# Altium PCB EBC2.PcbDoc (part 1 of 2)
Units mil, origin at the board's own origin, x right, y up, seen from the top; angles counter-clockwise.
Board outline 4019.72 x 2051.49 mil, 2 copper layers (Top Layer, Bottom Layer), stack 12.8 mil thick; 138 components, 112 nets, 469 pads, 88 vias.
Unrouted connection lines stored in the file: 2.
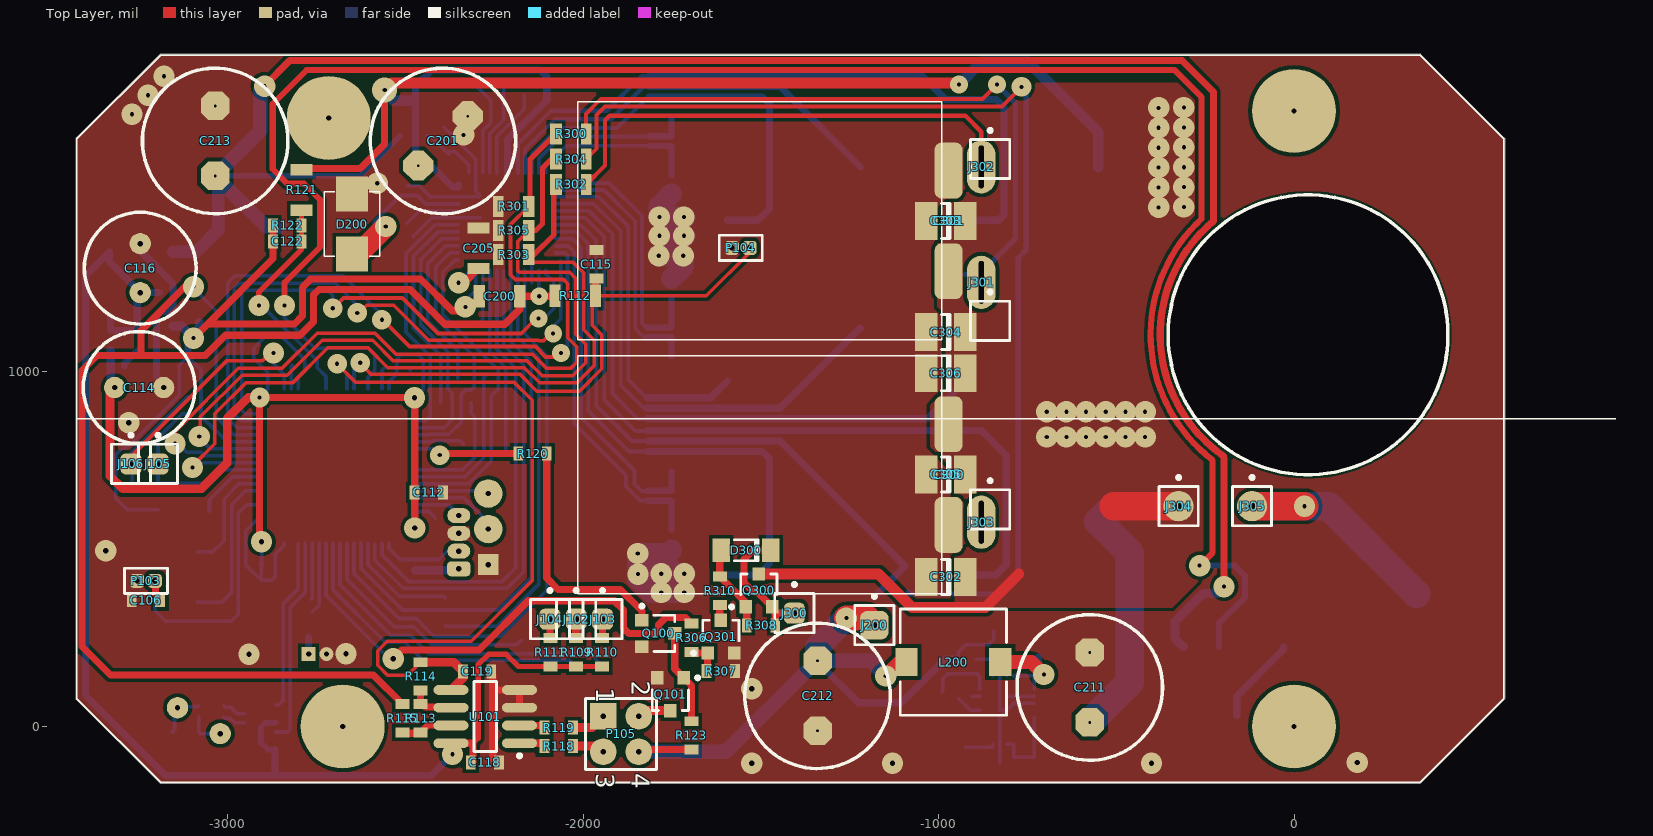
[diagram p0: Top Layer view]
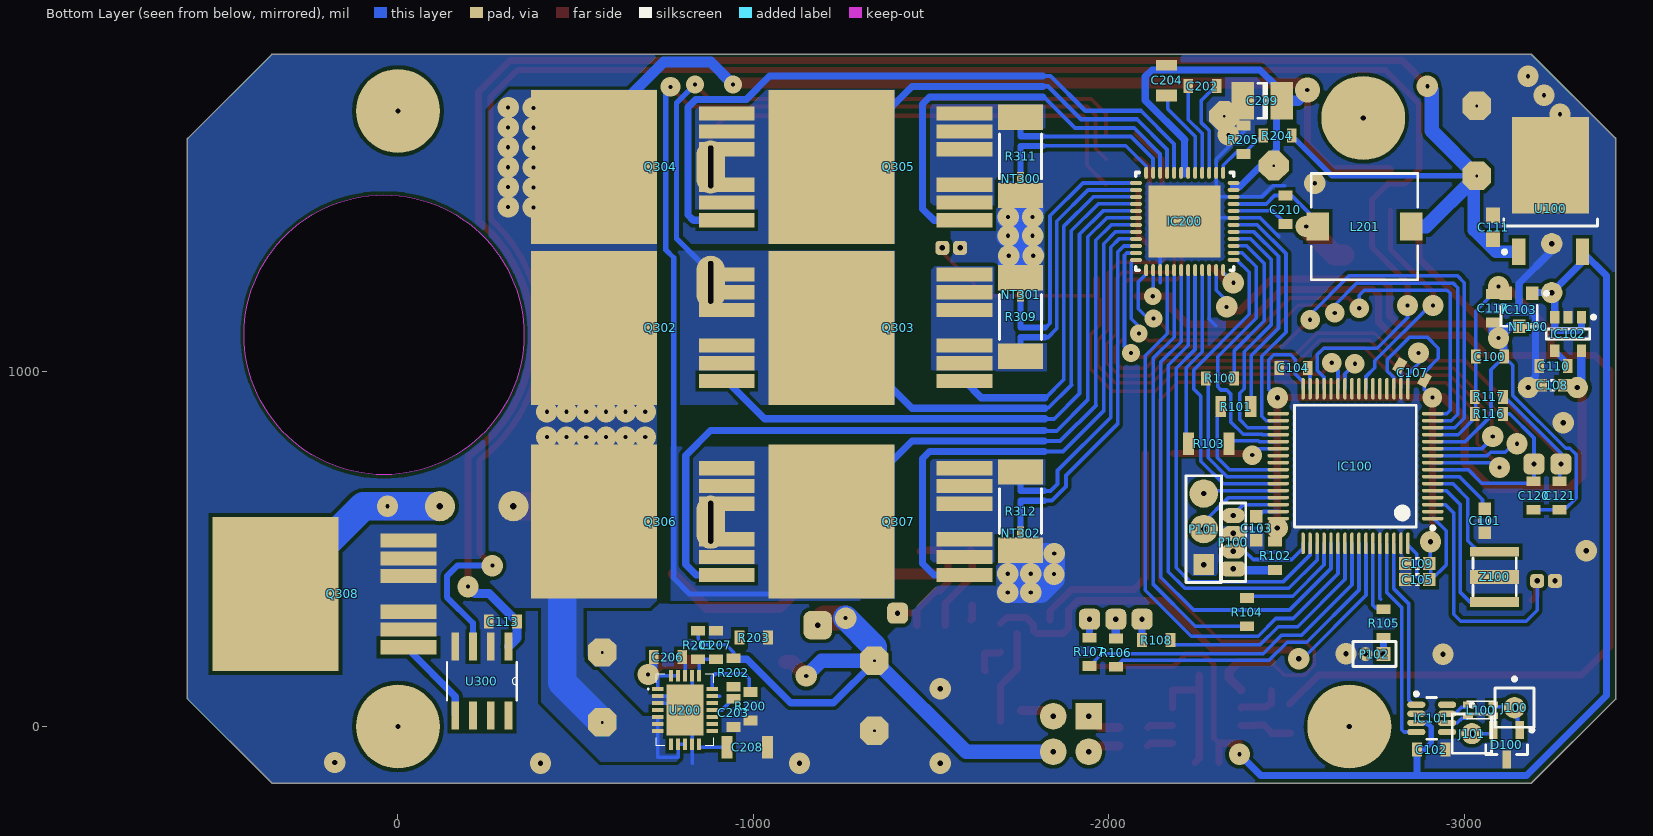
[diagram p1: Bottom Layer view, seen from below]

## Layer stack, top to bottom
Top Solder: solder mask 0.4, Solder Resist, Dk 3.5
Top Layer: signal copper 1.4
Dielectric1: core 10, FR-4, Dk 4.2
Bottom Layer: signal copper 1.4
Bottom Solder: solder mask 0.4, Solder Resist, Dk 3.5

## Board outline
-3425.43,76.17 -3190.86,-158.4 ccw(c-3189.46,-157) -3190.65,-158.59 ccw(c-3189,-157.48) -3189,-159.46 354,-159.46 ccw(c354,-157.48) 355.48,-158.81 ccw(c354.91,-156.91) 356.31,-158.31 591.95,77.34 ccw(c590.55,78.74) 592.53,78.74 ccw(c590.55,78.74) 592.53,78.81 ccw(c590.55,78.89) 592.53,78.89 592.53,1654.14 ccw(c590.55,1654.14) 590.79,1656.11 355.45,1891.45 ccw(c354.05,1890.05) 353.03,1891.75 -3189,1891.75 ccw(c-3189,1889.76) -3190.62,1890.91 ccw(c-3189.37,1889.37) -3190.77,1890.77 -3424.53,1657.01 ccw(c-3425.2,1655.14) -3427.18,1655.14 -3427.18,78.14 ccw(c-3425.2,78.14)
cut-out: -354.33,1102.36 ccw(c39.37,1102.36) 39.37,708.66 ccw(c39.37,1102.36) 433.07,1102.36 ccw(c39.37,1102.36) 39.37,1496.06 ccw(c39.37,1102.36)

## Design rules (kind name [scope] priority, off if disabled: settings)
AssemblyTestPointUsage [All] p1 off:
AssemblyTestpoint [All] p1 off: testpointundercomponent=TRUE minsize=40 maxsize=100 preferedsize=60 minholesize=0 maxholesize=40 preferedholesize=32 testpointgrid=1 usegrid=TRUE gridtolerance=0.01 allowsidetop=TRUE allowsidebottom=TRUE
Clearance Clearance_Phases [InPolygon and InNetClass('Phases')] p1: gap=5 ignorepadtopadclearanceinfootprint=FALSE except(0: Arc-Hole Track-Hole SMDPad-Hole THPad-Hole Via-Hole Fill-Hole Poly-Hole Region-Hole Text-Hole; 7: Arc-Poly Track-Poly SMDPad-Poly THPad-Poly Via-Poly Fill-Poly Poly-Poly)
Clearance "Clearance pads mounting" [(InNet('HOUSING_0') OR InNet('HOUSING_1') OR InNet('HOUSING_2')) AND IsPad] p2: gap=0.1 ignorepadtopadclearanceinfootprint=FALSE except(0: Arc-Hole Track-Hole SMDPad-Hole THPad-Hole Via-Hole Fill-Hole Poly-Hole Region-Hole Text-Hole)
Clearance "Clearance main" [All] p3: gap=10.5 ignorepadtopadclearanceinfootprint=FALSE except(0: Arc-Hole Track-Hole SMDPad-Hole THPad-Hole Via-Hole Fill-Hole Poly-Hole Region-Hole Text-Hole; 6.5: SMDPad-SMDPad; 7: Arc-SMDPad Arc-Via Arc-Text Track-SMDPad Track-Via Track-Text SMDPad-Text THPad-Text Via-Text Fill-Text Poly-Text Region-Text Text-Text; 8: Arc-Arc Arc-Track Arc-THPad Track-Track Track-THPad SMDPad-THPad THPad-THPad; 8.5: SMDPad-Via THPad-Via Via-Via)
ComponentClearance [All] p1 off: gap=10 collisioncheckmode=3 verticalgap=10 showdistances=FALSE
DiffPairsRouting [All] p1: maxlimit=10 minlimit=5 mostfreqgap=5 toplayer_minwidth=6 toplayer_maxwidth=25 toplayer_prefwidth=8 bottomlayer_minwidth=6 bottomlayer_maxwidth=25 bottomlayer_prefwidth=8 maxuncoupledlength=500
FabricationTestPointUsage [All] p1 off: valid=0 allowmultiple=FALSE
FabricationTestpoint [(IsPad And (OnTopLayer Or OnBottomLayer))] p1 off: side=3 testpointundercomponent=TRUE minsize=40 maxsize=100 preferedsize=60 minholesize=0 maxholesize=40 preferedholesize=32 testpointgrid=1 allowsidetop=TRUE allowsidebottom=TRUE usegrid=TRUE gridtolerance=0.01
HoleSize [All] p1: absolutevalues=TRUE maxlimit=200 minlimit=1 maxpercent=80.000 minpercent=20.000
HoleToHoleClearance [All] p1: gap=5.12 allowstackedmicrovias=TRUE
MinimumSolderMaskSliver [All] p1 off: minsoldermaskwidth=1.97
NetAntennae [All] p1 off: netantennaetolerance=10
PasteMaskExpansion [All] p1 off: expansion=0
PlaneClearance [All] p1: clearance=10
PlaneConnect [All] p1: planeconnectstyle=Direct reliefexpansion=7.87 reliefentries=4 reliefconductorwidth=0 reliefairgap=7.87
PolygonConnect [All] p1: connectstyle=Direct reliefconductorwidth=11.81 reliefentries=4 polygonreliefangle="90 Angle" airgapwidth=11.81
RoutingVias [All] p1: holewidth=11.81 width=60 viastyle="Through Hole" minholewidth=5 minwidth=50 maxholewidth=180 maxwidth=180
SilkToSilkClearance [All] p1 off: silktosilkclearance=3.94
SilkToSolderMaskClearance SilkscreenOverComponentPads [IsPad] p1 off: minsilkscreentomaskgap=5.12 clearancetoexposedcopper=TRUE
SolderMaskExpansion [All] p1 off: expansion=7.87
Width [All] p1: maxlimit=236.22 minlimit=10 preferedwidth=10
15 further rules are at their usual default settings.

## Classes and differential pairs
net class CAN: CAN_RX CAN_TX
component class CTR1: C1 C2 C4 C5 C6 C7 C10 C11 C15 C17 C18 C19 C22 C23 C26 C100 C101 C102 C103 C104 C105 C106 C107 C108 C109 C110 C111 C112 C113 C114 C115 C116 C117 C118 C119 C120 C121 C122 D1 D100 H2.1 HL1 IC1 IC2 IC3 IC100 IC101 IC102 IC103 J100 J101 J102 J103 J104 J105 J106 L100 NT100 P100 P101 P102 P103 P104 P105 Q100 Q101 R3 R4 R5 R13 R14 R15 R16 R20 R21 R100 R101 R102 R103 R104 R105 R106 R107 R108 R109 R110 R111 R112 R113 R114 R115 R116 R117 R118 R119 R120 R121 R122 R123 R? U1 U2 U100 U101 Y1 Z100
component class PWR1: C42 C48 C49 C51 C52 C53 C300 C301 C302 C303 C304 C305 C306 D300 J300 J301 J302 J303 J304 J305 NT2 NT3 NT4 NT6 NT8 NT9 NT10 NT11 NT12 NT300 NT301 NT302 NT304 NT? Q6 Q7 Q9 Q10 Q11 Q12 Q300 Q301 Q302 Q303 Q304 Q305 Q306 Q307 Q308 R36 R39 R48 R49 R51 R52 R53 R54 R300 R301 R302 R303 R304 R305 R306 R307 R308 R309 R310 R311 R312 U300 VT?
component class DRV1: C29 C32 C35 C37 C200 C201 C202 C203 C204 C205 C206 C207 C208 C209 C210 C211 C212 C213 D200 IC200 J200 L200 L201 R200 R201 R202 R203 R204 R205 U200
net class Stabilizers: _3.3V NetC110_1
net class Control: 1_H_CONTROL 2_H_CONTROL 3_H_CONTROL SPI_MISO SPI_MOSI SPI_SCK

## Components (designator, comment, footprint, x,y, rotation, side; value= is the part's Value field where it differs from the comment)
C100 "2.2u" 0603x -3073,1041 r180 bottom value="CAP CER 2.2UF 25V X5R 0603"
C101 "0.1u" CAPC1608X08N(0603) -3058,579 r270 bottom value="CAP CER 0.1UF 50V X7R 0603"
C102 "0.1u" 0603x -2908,-65 r0 bottom value="CAP CER 0.1UF 50V X7R 0603"
C103 "2.2u" CAPC1608X08N(0603) -2415.59,557.68 r270 bottom value="CAP CER 2.2UF 25V X5R 0603"
C104 "2.2u" 0603x -2520,1009 r0 bottom value="CAP CER 2.2UF 25V X5R 0603"
C105 "2.2u" CAPC1608X08N(0603) -2868.59,413.68 r0 bottom value="CAP CER 2.2UF 25V X5R 0603"
C106 "0.1u" 0603x -3231,356 r180 top value="CAP CER 0.1UF 50V X7R 0603"
C107 "0.1u" 0603x -2854,996 r30 bottom value="CAP CER 0.1UF 50V X7R 0603"
C108 "0.1u" CAPC1608X08N(0603) -3249,960 r0 bottom value="CAP CER 0.1UF 50V X7R 0603"
C109 "0.1u" CAPC1608X08N(0603) -2868.59,458.68 r0 bottom value="CAP CER 0.1UF 50V X7R 0603"
C110 "10nf 50V 10%" 0603x -3252,1014 r0 bottom value="CAP CER 10000PF 50V X7R 0402"
C111 "0.1u" ERA-0603 -3082,1405 r90 bottom value="CAP CER 0.1UF 50V X7R 0603"
C112 "2.2u" 0603x -2435,659 r0 top value="CAP CER 2.2UF 25V X5R 0603"
C113 "2.2u" 0603x -295.28,295.28 r0 bottom value="CAP CER 2.2UF 25V X5R 0603"
C114 "CAP TANT POLY 220UF 6.3V 2312 15mOhm" CAP_POLY_330 -3250,954 r0 top
C115 "0.1u" 0603x -1963,1301 r90 top value="CAP CER 0.1UF 50V X7R 0603"
C116 "CAP TANT POLY 220UF 6.3V 2312 15mOhm" CAP_POLY_330 -3247,1290 r90 top
C117 "0.1u" 0603x -3081,1177 r270 bottom value="CAP CER 0.1UF 50V X7R 0603"
C118 "Cap" 0603x -2277,-101 r0 top value=10n
C119 "Cap" 0603x -2299,155 r0 top value=10n
C120 "0.1u" 0603x -3196,650 r270 bottom value="CAP CER 0.1UF 50V X7R 0603"
C121 "0.1u" 0603x -3269,650 r270 bottom value="CAP CER 0.1UF 50V X7R 0603"
C122 "0.1u" 0603x -2833,1365 r180 top value="CAP CER 0.1UF 50V X7R 0603"
C200 "2.2u 25V" 1206x -2235.91,1211 r0 top value=100pF
C201 "100u 63V" CAP_ELEC_10mm -2395,1648 r135 top value=100pF
C202 "47n" 0603x -2264,1802 r0 bottom value=100pF
C203 "22nF" 0603x -943.89,38.37 r90 bottom value=100pF
C204 "1u" 0805x -2163,1818 r270 bottom value=100pF
C205 "2.2u 25V" 1206x -2295,1346 r270 top value=100pF
C206 "0.1u" 0603x -759.89,195.37 r0 bottom value=100pF
C207 "0.1u" 0603x -894.89,229.37 r90 bottom value=100pF
C208 "10uF" 1206x -982.89,-58.63 r180 bottom value=100pF
C209 "2.2U" 1210 -2432,1761 r180 bottom value=100pF
C210 "0.1u" 0603x -2497,1454.1 r90 bottom value=100pF
C211 "100u 63V" CAP_ELEC_10mm -574.89,110 r0 top value=100pF
C212 "1000u 25V" CAP_ELEC_10mm -1340.89,86.43 r0 top value=100pF
C213 "1000u 25V" CAP_ELEC_10mm -3036,1648 r180 top value=100pF
C300 "1000uF 35V 10%" CAP_1mF_63V_SMD -972,708.94 r180 top value="CAP CER 0.022UF 50V X7R 0402"
C301 "1000uF 35V 10%" CAP_1mF_63V_SMD -972,1422.94 r180 top value="CAP CER 0.022UF 50V X7R 0402"
C302 "2.2u" 1210 -980,421 r0 top value=100pF
C303 "2.2u" 1210 -980,1423 r0 top value=100pF
C304 "2.2u" 1210 -980,1110 r0 top value=100pF
C305 "2.2u" 1210 -980,709.5 r0 top value=100pF
C306 "2.2u" 1210 -980,994 r0 top value=100pF
D100 "NUP2105LT1G" SOT23_N -3120,-51 r270 bottom
D200 "CDBB2100-G" SMB_real -2651,1414 r90 top
D300 "1N4751A" SOD80C -1542,496 r0 top
IC100 "STM32F405" LQFP64_L -2694.61,733.02 r0 bottom value=STM32F405RGT6
IC101 "TCAN332GDCNT" SOT23-8_L -2909,23 r180 bottom
IC102 "TPS73233DBVT" SOT23-5_L -3292.71,1104.78 r270 bottom value="LDO 3.3V 250mA"
IC103 "LT1460KCS3-3.3" SOT-23 -3155,1173 r0 bottom value="Voltage reference 3.3V 0.5% 50ppm/C"
IC200 "DRV8323" PWQFN-48 -2213.93,1421.39 r270 bottom
J100 "Socket" PIN1#1 -3142,53 r180 bottom
J101 "Socket" PIN1#2 -3022,-20 r180 bottom
J102 "Socket" PIN1#3 -2020,302 r0 top
J103 "Socket" PIN1#3 -1946,302 r0 top
J104 "Socket" PIN1#3 -2094,302 r0 top
J105 "Socket" PIN1#3 -3197,739 r0 top
J106 "Socket" PIN1#3 -3273,739 r0 top
J200 "Socket" PIN1#4 -1181.1,285.43 r0 top
J300 "Socket" PIN1#3 -1406,319 r0 top
J301 "Socket" PIN1#5 -855,1141.73 r0 top
J302 "Socket" PIN1#6 -855,1597 r0 top
J303 "Socket" PIN1#7 -855,611 r0 top
J304 "Socket" PIN1#8 -324.8,620.08 r0 top
J305 "Socket" PIN1#8 -118.11,620.08 r0 top
L100 "CMC 100MA 2LN 90 OHM SMD" Choke_smd -3047,46 r0 bottom
L200 "Inductor" DR74 -958.78,181.37 r0 top value=33u
L201 "Inductor" DR74 -2720,1407 r0 bottom value=33u
NT100 "NET_TIE" NET_TIE_20mil -3190,1125 r0 bottom net-tie
NT300 "NET_TIE" NET_TIE_20mil -1751.97,1531.5 r90 bottom net-tie
NT301 "NET_TIE" NET_TIE_20mil -1751.97,1225.35 r270 bottom net-tie
NT302 "NET_TIE" NET_TIE_20mil -1751.97,533.46 r90 bottom net-tie
P100 "Header 4" MHDR1X4 -2350.59,443.68 r90 bottom
P101 "Header 3" HDR1X3 -2267.59,455.68 r90 bottom
P102 "MHDR1X2" MHDR1X2#1 -2773,204 r0 bottom
P103 "MHDR1X2" MHDR1X2#2 -3206,410 r180 top
P104 "MHDR1X2" MHDR1X2#2 -1532,1347 r180 top
P105 "Header 2X2" HDR2X2 -1944,29 r270 top
Q100 "2N7002" SOT-23 -1789,262 r270 top
Q101 "2N7002" SOT-23 -1755,91 r180 top
Q300 "IRLML2803" SOT-23 -1506,383 r0 top
Q301 "2N7002" SOT-23 -1613,253 r0 top
Q302 "IRF7530" D2PAK-7 -551.18,1122.05 r90 bottom
Q303 "IRF7530" D2PAK-7 -1220.47,1122.05 r90 bottom
Q304 "IRF7530" D2PAK-7 -551.18,1574.8 r90 bottom
Q305 "IRF7530" D2PAK-7 -1220.47,1574.8 r90 bottom
Q306 "IRF7530" D2PAK-7 -551.18,576.77 r90 bottom
Q307 "IRF7530" D2PAK-7 -1220.47,576.77 r90 bottom
Q308 "IRF7530" D2PAK-7 344.49,373.23 r90 bottom
R100 "Res1" 0603x -2313.43,980 r0 bottom value=1K
R101 "Res1" 0805x -2358,900 r180 bottom value=1K
R102 "Res1" 0603x -2468.59,480.68 r90 bottom value=1K
R103 "Res1" 1206x -2282,796 r180 bottom value=1K
R104 "Res1" 0603x -2389,322 r90 bottom value=1K
R105 "Res1" 0603x -2774,290 r270 bottom value=1K
R106 "Res1" 0603x -2020,208 r90 bottom value=1K
R107 "Res1" 0603x -1946,210 r90 bottom value=1K
R108 "Res1" 0603x -2134,243 r0 bottom value=1K
R109 "Res1" 0603x -2020,209 r270 top value=1K
R110 "Res1" 0603x -1947,209 r270 top value=1K
R111 "Res1" 0603x -2093,209 r270 top value=1K
R112 "10k, 1%" 1206x -2023,1212 r0 top value="RES SMD 10K OHM 1% 1/10W 0603"
R113 "Res1" 0603x -2458,23 r90 top value=1K
R114 "Res1" 0603x -2458,141 r270 top value=1K
R115 "Res1" 0603x -2509,23 r90 top value=1K
R116 "10k, 1%" 0603x -3070,880 r180 bottom value="RES SMD 10K OHM 1% 1/10W 0603"
R117 "10k, 1%" 0603x -3070,928 r180 bottom value="RES SMD 10K OHM 1% 1/10W 0603"
R118 "Res1" 0603x -2069,-55 r180 top value=1K
R119 "Res1" 0603x -2069,-3 r180 top value=1K
R120 "Res1" 0603x -2143,768 r0 top value=1K
R121 "39k, 1%" 1206x -2793,1509.91 r270 top value="RES SMD 39K OHM 1% 1/10W 0603"
R122 "2.2k, 1%" 0603x -2833,1410 r180 top value="RES SMD 2.2K OHM 1% 1/10W 0603"
R123 "Res1" 0603x -1696,-25 r90 top value=1K
R200 "Res1" 0603x -991.89,57.37 r270 bottom value=18k
R201 "Res1" 0603x -844.89,229.37 r90 bottom value=4.7R
R202 "Res1" 0603x -944,152 r90 bottom value=18k
R203 "Res1" 0603x -1001,250 r0 bottom value=18k
R204 "Res1" 0603x -2475,1663 r180 bottom value=18k
R205 "Res1" 0603x -2379,1651 r270 bottom value=3.3k
R300 "39k, 1%" 0805x -2035,1668 r180 top
R301 "2.2k, 1%" 0805x -2196,1464 r0 top
R302 "39k, 1%" 0805x -2035,1526 r180 top
R303 "2.2k, 1%" 0805x -2196,1328 r0 top
R304 "39k, 1%" 0805x -2035,1597 r180 top
R305 "2.2k, 1%" 0805x -2196,1396 r0 top
R306 "Res1" 0603x -1696,250 r90 top value=1K
R307 "Res1" 0603x -1613,156 r0 top value=1K
R308 "Res1" 0603x -1500,285 r0 top value=1K
R309 "Res1" 2512 -1751.97,1152.52 r270 bottom value=R??
R310 "Res1" 0603x -1616,382 r90 top value=1K
R311 "Res1" 2512 -1751.97,1604.33 r90 bottom value=R??
R312 "Res1" 2512 -1751.97,606.3 r90 bottom value=R??
U100 "LM78M05CDT/NOPB" TD03B_N -3244,1507 r90 bottom
U101 "MAX9918" SO8_M -2276,28 r180 top
U200 "MAX17574ATG+" QFN50P500X400X80-25N -807.89,46.37 r180 bottom
U300 "LM5107MAX/NOPB" SOIC127P620X175-8N -236.22,127.95 r270 bottom
Z100 "AWSCR-8.00CV-T" CRYSTAL_CERAMIC -3086,421.13 r90 bottom value="CER RES 8.0000MHZ 22PF SMD"

## Footprints (in the part's own frame and the unit in brackets; to place one, negate y for a bottom-side part, rotate by r counter-clockwise, add the part's x,y. Pads: shape width x height; smd on the part's side, far side on the other; paste and mask are expansions set on the pad)
0603x [mm] "Chip Resistor; Body 1.6 x 0.8 mm (LxW typ)"
  rect 0.7x1 smd: 1(-1.016,0) 2(1.016,0)
0805x [mil] "Chip Resistor; Body 2 x 1.3 mm (LxW typ)"
  rect 33x59.06 smd: 1(42,0)
  rect 30x59.06 smd: 2(-43,0)
1206x [mm]
  rect 0.8x1.6 smd: 1(-1.45,0) 2(1.45,0)
1210 [mm] "Chip Capacitor; Body 3.2 x 2.5 mm (LxW typ)"
  rect 1.6x2.7 smd: 1(1.4,0) 2(-1.4,0)
  silkscreen extent -0.3,-1.25 0.3,1.25
2512 [mm] "Chip Resistor; Body 6.4 x 3.2 mm (LxW typ)"
  rect 1.8x3.2 smd: 1(-2.8,0) 2(2.8,0)
  silkscreen extent -1.6,-1.5 1.6,1.5
CAP_1mF_63V_SMD [mm]
  rrect50% 2x4 smd: 1(0,-3.6) 2(0,3.6)
  silkscreen extent 0.5,-8.5 26.5,8.5
CAP_ELEC_10mm [mil]
  oct 80x80 hole 7.87: 1(0,98.43) 2(0,-98.43)
  silkscreen extent -205,-205 205,205
CAP_POLY_330 [mil]
  round 60 hole 15: 1(-68.9,0) 2(68.9,0)
  silkscreen extent -157,-157 157,157
CAPC1608X08N(0603) [mm] "Chip Capacitor, 2-Leads, Body 1,60x0,80mm, IPC Medium Density"
  rect 0.9x0.9 smd: 1(-0.85,0) 2(0.85,0)
  silkscreen extent -0.1,-0.35 0.1,0.35, body extent -0.8,-0.4 0.8,0.4, height 0.8
Choke_smd [mm] "Smd choke"
  rect 0.7x0.45 smd: 1(-0.9,0.4) 2(-0.9,-0.4) 3(0.9,-0.4) 4(0.9,0.4)
  silkscreen extent -1,-0.63 1,0.63
CRYSTAL_CERAMIC [mm]
  rect 0.7x3.5 smd: 1(-1.8,0) 3(1.8,0)
  rect 1x3.5 smd: 2(0,0)
  silkscreen extent -1.35,-1.55 1.35,1.55
D2PAK-7 [mm]
  rect 1.016x4 smd: 1(-3.81,-9.5) 2(-2.54,-9.5) 3(-1.27,-9.5) 4(1.27,-9.5) 5(2.54,-9.5) 6(3.81,-9.5)
  rect 11x9 smd: 7(0,0)
  body extent -5.5,-5.5 5.5,3.5, height 4.3
DR74 [mm] "Precision Wire Wound Inductor, 2-Leads, Body 7,60x7,60mm, IPC High Density"
  rect 1.6x2 smd: 1(3.35,0) 2(-3.35,0)
  silkscreen extent -3.8,-3.8 3.8,3.8, body extent -3.8,-3.8 3.8,3.8, height 4.35
ERA-0603 [mm] "Chip Resistor; Body 1.6 x 0.8 mm (LxW typ)"
  rect 1.1x1 smd: 1(-0.85,0) 2(0.85,0)
HDR1X3 [mil] "Connector; Header; 3 Position"
  rect 59.06x59.06 hole 15: 1(0,0)
  round 80 hole 15: 2(100,0) 3(200,0)
  silkscreen extent -50,-50 250,50
HDR2X2 [mil] "Connector; Header; 2x2 Position"
  rect 75x75 hole 15: 1(0,0)
  round 75 hole 15: 2(0,100) 3(100,0) 4(100,100)
  silkscreen extent -50,-50 150,150
LQFP64_L [mm] "Thin QFP, 64-Leads, Body 10x10mm, Pitch 0.5mm, IPC High Density"
  oval 1.55x0.25 smd: 1(-5.525,3.75) 2(-5.525,3.25) 3(-5.525,2.75) 4(-5.525,2.25) 5(-5.525,1.75) 6(-5.525,1.25) 7(-5.525,0.75) 8(-5.525,0.25) 9(-5.525,-0.25) 10(-5.525,-0.75) 11(-5.525,-1.25) 12(-5.525,-1.75) 13(-5.525,-2.25) 14(-5.525,-2.75) 15(-5.525,-3.25) 16(-5.525,-3.75) 33(5.525,-3.75) 34(5.525,-3.25) 35(5.525,-2.75) 36(5.525,-2.25) 37(5.525,-1.75) 38(5.525,-1.25) 39(5.525,-0.75) 40(5.525,-0.25) 41(5.525,0.25) 42(5.525,0.75) 43(5.525,1.25) 44(5.525,1.75) 45(5.525,2.25) 46(5.525,2.75) 47(5.525,3.25) 48(5.525,3.75)
  oval 0.25x1.55 smd: 17(-3.75,-5.525) 18(-3.25,-5.525) 19(-2.75,-5.525) 20(-2.25,-5.525) 21(-1.75,-5.525) 22(-1.25,-5.525) 23(-0.75,-5.525) 24(-0.25,-5.525) 25(0.25,-5.525) 26(0.75,-5.525) 27(1.25,-5.525) 28(1.75,-5.525) 29(2.25,-5.525) 30(2.75,-5.525) 31(3.25,-5.525) 32(3.75,-5.525) 49(3.75,5.525) 50(3.25,5.525) 51(2.75,5.525) 52(2.25,5.525) 53(1.75,5.525) 54(1.25,5.525) 55(0.75,5.525) 56(0.25,5.525) 57(-0.25,5.525) 58(-0.75,5.525) 59(-1.25,5.525) 60(-1.75,5.525) 61(-2.25,5.525) 62(-2.75,5.525) 63(-3.25,5.525) 64(-3.75,5.525)
  silkscreen extent -5.65,-4.35 4.35,4.55, body extent -5,-5 5,5, height 1.6
MHDR1X2#1 [mm] "Connector; Header; 2 Position"
  rect 1x1 hole 0.381: 1(0,0)
  round 1 hole 0.381: 2(1.27,0)
  silkscreen extent -0.9,-0.9 2.17,0.9
MHDR1X2#2 [mm] "Connector; Header; 2 Position"
  rrect50% 1x1 hole 0.381: 1(0,0) 2(1.27,0)
  silkscreen extent -0.9,-0.9 2.17,0.9
MHDR1X4 [mil] "Connector; Header; 4 Position"
  rrect50% 42x65 hole 15: 1(0,0)
  oval 42x65 hole 15: 2(50,0) 3(100,0) 4(150,0)
  silkscreen extent -35,-35 185,35
NET_TIE_20mil [mil] "Net tie"
  rect 20x20 smd paste+0 mask+0: 1(19.68,0) 2(0,0)
PIN1#1 [mil] "Connector; Plug"
  round 60 hole 15: 1(0,0)
  silkscreen extent -55,-55 55,86
PIN1#2 [mil] "Connector; Plug"
  oval 60x59.06 hole 15: 1(0,0)
  silkscreen extent -55,-55 55,86
PIN1#3 [mil] "Connector; Plug"
  rrect50% 59.06x59.06 hole 15: 1(0,0)
  silkscreen extent -55,-55 55,86
PIN1#4 [mil] "Connector; Plug"
  rrect50% 80x80 hole 15: 1(0,0)
  silkscreen extent -55,-55 55,86
PIN1#5 [mil] "Connector; Plug"
  oval 80x150 hole 15 slot 120 at 90 deg: 1(-25,108.27)
  silkscreen extent -55,-55 55,86
PIN1#6 [mil] "Connector; Plug"
  oval 80x150 hole 15 slot 120 at 90 deg: 1(-25,-22.2)
  silkscreen extent -55,-55 55,86
PIN1#7 [mil] "Connector; Plug"
  oval 80x150 hole 15 slot 120 at 90 deg: 1(-25,-36)
  silkscreen extent -55,-55 55,86
PIN1#8 [mil] "Connector; Plug"
  round 85 hole 18: 1(0,0)
  silkscreen extent -55,-55 55,86
PWQFN-48 [mm]
  rect 5.15x5.15 smd paste-5 mask+0: 0(0,0)
  oval 0.85x0.28 smd mask+0.07: 1(-3.475,2.75) 2(-3.475,2.25) 3(-3.475,1.75) 4(-3.475,1.25) 5(-3.475,0.75) 6(-3.475,0.25) 7(-3.475,-0.25) 8(-3.475,-0.75) 9(-3.475,-1.25) 10(-3.475,-1.75) 11(-3.475,-2.25) 12(-3.475,-2.75) 25(3.475,-2.75) 26(3.475,-2.25) 27(3.475,-1.75) 28(3.475,-1.25) 29(3.475,-0.75) 30(3.475,-0.25) 31(3.475,0.25) 32(3.475,0.75) 33(3.475,1.25) 34(3.475,1.75) 35(3.475,2.25) 36(3.475,2.75)
  oval 0.28x0.85 smd mask+0.07: 13(-2.75,-3.475) 14(-2.25,-3.475) 15(-1.75,-3.475) 16(-1.25,-3.475) 17(-0.75,-3.475) 18(-0.25,-3.475) 19(0.25,-3.475) 20(0.75,-3.475) 21(1.25,-3.475) 22(1.75,-3.475) 23(2.25,-3.475) 24(2.75,-3.475) 37(2.75,3.5) 38(2.25,3.5) 39(1.75,3.5) 40(1.25,3.5) 41(0.75,3.5) 42(0.25,3.5) 43(-0.25,3.5) 44(-0.75,3.5) 45(-1.25,3.5) 46(-1.75,3.5) 47(-2.25,3.5) 48(-2.75,3.5)
  silkscreen extent -3.5,-3.5 3.5,3.5, body extent -3.5,-3.5 3.5,3.5, height 0.85
QFN50P500X400X80-25N [mm]
  rect 0.84x0.27 smd: 1(-1.945,1.5) 2(-1.945,1) 3(-1.945,0.5) 4(-1.945,0) 5(-1.945,-0.5) 6(-1.945,-1) 7(-1.945,-1.5) 13(1.945,-1.5) 14(1.945,-1) 15(1.945,-0.5) 16(1.945,0) 17(1.945,0.5) 18(1.945,1) 19(1.945,1.5)
  rect 0.27x0.84 smd: 8(-1,-2.445) 9(-0.5,-2.445) 10(0,-2.445) 11(0.5,-2.445) 12(1,-2.445) 20(1,2.445) 21(0.5,2.445) 22(0,2.445) 23(-0.5,2.445) 24(-1,2.445)
  rect 2.65x3.65 smd: 25(0,0)
  silkscreen extent -2.68,-2.55 2.05,2.55
SMB_real [mm]
  rect 2.5x2.3 smd: 1(2.15,0) 2(-2.15,0)
  silkscreen extent -2.3,-1.97 2.3,1.98
SO8_M [mm] "SOIC, 8-Leads, Body 4.9x3.9mm, Pitch 1.27mm, IPC Low Density"
  oval 2.5x0.7 smd: 1(-2.45,1.905) 2(-2.45,0.635) 3(-2.45,-0.635) 4(-2.45,-1.905) 5(2.45,-1.905) 6(2.45,-0.635) 7(2.45,0.635) 8(2.45,1.905)
  silkscreen extent -2.58,-2.5 0.8,2.93, body extent -2,-2.5 2,2.5, height 1.75
SOD80C [mm] "Metal Electrode Face (MELF) Diode; Body 3.5 x 1.6 mm (LxDia)"
  rect 1.25x1.7 smd: 1(-1.775,0) 2(1.775,0)
  silkscreen extent -0.85,-0.75 0.85,0.75
SOIC127P620X175-8N [mil]
  rect 78x22 smd: 1(-97,75) 2(-97,25) 3(-97,-25) 4(-97,-75) 5(97,-75) 6(97,-25) 7(97,25) 8(97,75)
  silkscreen extent -54,-98 54,99
SOT23-5_L [mm] "SOT23, 5-Leads, Body 2.9x1.6mm, Pitch 0.95mm, Lead Span 2.8mm, IPC High Density"
  rect 0.9x0.65 smd: 1(-1.2,0.95) 2(-1.2,0) 3(-1.2,-0.95) 4(1.2,-0.95) 5(1.2,0.95)
  silkscreen extent -1.32,-1.55 0.35,1.95, body extent -0.9,-1.55 0.9,1.55, height 1.45
SOT23-8_L [mm] "SOP, 8-Leads, Body 2.9x1.6mm, Pitch 0.65mm, IPC High Density"
  oval 1.3x0.45 smd: 1(-1.1,0.975) 2(-1.1,0.325) 3(-1.1,-0.325) 4(-1.1,-0.975) 5(1.1,-0.975) 6(1.1,-0.325) 7(1.1,0.325) 8(1.1,0.975)
  silkscreen extent -1.22,-1.5 0.35,1.87, body extent -0.88,-1.5 0.88,1.5, height 1.45
SOT23_N [mm] "SOT23, 3-Leads, Body 2.9x1.3mm, Pitch 0.95mm, Lead Span 2.3mm, IPC Medium Density"
  rect 1.3x0.6 smd: 1(-1.05,0.95) 2(-1.05,-0.95) 3(1.05,0)
  silkscreen extent -1.17,-1.5 0.7,1.92, body extent -0.7,-1.5 0.7,1.5, height 1.1
SOT-23 [mm] "SOT-23; 3 Leads; Body 3.1 x 2.5 mm, inc. leads (LxW max)"
  rect 0.9x0.95 smd: 1(-0.95,-1.175) 2(0.95,-1.175) 3(0,1.175)
  silkscreen extent -2.07,-1.3 1.3,1.18
TD03B_N [mm] "D-PAK, 4-Leads, Body 6.1x6.6mm, Pitch 2.29mm, Lead Span 9.7mm, IPC Medium Density"
  rect 1.9x0.95 smd: 1(-4.35,2.28) 3(-4.35,-2.28)
  rect 6.9x5.5 smd: 4(1.85,0)
  silkscreen extent -4.47,-3.35 -2,3.43, body extent -2.5,-3.35 3.7,3.35, height 2.38

## Part data
C100 C103 C104 C105 C107 C108 C109 C112 C113: library part "Ceramic Chip Capacitor", Package=CAPC1608X08N(0603)
  C100 C103 C104 C105 C112 C113: Distributor="Murata Electronics", Order Number=GRM188R61E225KA12D
  C107 C108 C109: Distributor="AVX Corporation", Order Number=06035C104KAT2A
C101 C102 C106 C111 C115 C117 C120 C121 C122: library part "Ceramic Chip Capacitor", Package=0603, Distributor="AVX Corporation", Order Number=06035C104KAT2A
C110 C300 C301: library part "Ceramic Chip Capacitor", Package=0402
  C110: Distributor="TDK Corporation", Order Number=CGA2B3X7R1H103K050BD
  C300 C301: Distributor="Murata Electronics", Order Number=GRM155R71H223KA12D
C114 C116: library part "Tantalum Chip Capacitor", Package=C, Distributor=KEMET, Order Number=T520C227M006ATE015
C118 C119: "Capacitor", LatestRevisionDate=17-Jul-2002, LatestRevisionNote="Re-released for DXP Platform.", PackageDescription="Radial Cap, Thru-Hole; 2 Leads; 0.3 in Pin Spacing", PackageReference=RAD-0.3, Published=8-Jun-2000, Publisher="Altium Limited"
C200 C201 C202 C203 C204 C205 C206 C207 C208 C209 C210 C211 C212 C213 C302 C303 C304 C305 C306: library part Cap, "Capacitor", LatestRevisionDate=17-Jul-2002, LatestRevisionNote="Re-released for DXP Platform.", PackageDescription="Radial Cap, Thru-Hole; 2 Leads; 0.3 in Pin Spacing", PackageReference=RAD-0.3, Published=8-Jun-2000, Publisher="Altium Limited"
D100: library part BAT54A, "Schottky Barrier Double Diode", Package=SOT23, ComponentLink1Description="Manufacturer Link", ComponentLink1URL=http://www.semiconductors.philips.com/, Distributor="ON Semiconductor", LatestRevisionNote="IPC-7351 Footprint Added.", Order Number=NUP2105LT1G, PackageDescription="3-Pin SOT-23 Package 0.95 mm Pitch, 2.3 mm Lead Span"
D200: library part Diode, "Default Diode", Code_JEDEC=DO-214-AB, LatestRevisionDate=17-Jul-2002, LatestRevisionNote="Re-released for DXP Platform.", PackageDescription="DO-214-AB/SMC; 2 C-Bend Leads; Body 7.9 x 5.9 mm, inc. leads (LxW)", PackageReference=SMC, PackageVersion=Sep-1996, Published=8-Jun-2000, Publisher="Altium Limited"
D300: "1W Zener Diode", Code_JEDEC=DO-204-AL, ComponentLink1Description="Manufacturer Link", ComponentLink1URL=http://www.vishay.com/, ComponentLink2Description=Datasheet, ComponentLink2URL=http://www.vishay.com/docs/85816/85816.pdf, DatasheetDocument="REV. H", LatestRevisionDate=17-Jul-2002, LatestRevisionNote="Re-released for DXP Platform.", PackageReference=DO-41, Published=8-Jun-2000, Publisher="Altium Limited"
IC100: "STM32 ARM-based 32-bit MCU", Package=LQFP-64, Distributor=STMicroelectronics, Order Number=STM32F405RGT6
IC101: Package=SOT23-8, Distributor="Texas Instruments", Order Number=TCAN332GDCNT
IC102: library part TPS7xx33, Package=SOT23-5, Distributor="Texas Instruments", Order Number=TPS73233DBVT
IC103: library part PreciseRef, Package=SOT23, Distrubutor="Linear Technology", Order Number=LT1460KCS3-3.3#TRMPBF
L100: library part Choke, Package="0805 (2012 Metric), 4 PC Pad", Distributor=Panasonic, Order Number=EXC-34CG900U
NT100 NT300 NT301 NT302: library part "Net tie", "Net tie"
P100: "Header, 4-Pin", LatestRevisionDate=17-Jul-2002, LatestRevisionNote="Re-released for DXP Platform.", Publisher="Altium Limited"
P101: "Header, 3-Pin", LatestRevisionDate=17-Jul-2002, LatestRevisionNote="Re-released for DXP Platform.", Publisher="Altium Limited"
P102 P103 P104: "Header, 2-Pin", LatestRevisionDate=17-Jul-2002, LatestRevisionNote="Re-released for DXP Platform.", Publisher="Altium Limited"
P105: "Header, 2-Pin, Dual row", LatestRevisionDate=17-Jul-2002, LatestRevisionNote="Re-released for DXP Platform.", Publisher="Altium Limited"
Q100 Q101 Q301: "N-channel Enhancement Mode Field-effect Transistor", ComponentLink1Description="Manufacturer Link", ComponentLink1URL=http://www.semiconductors.philips.com/, ComponentLink2Description=Datasheet, ComponentLink2URL=http://www.semiconductors.philips.com/acrobat/datasheets/2N7002_4.pdf, DatasheetVersion=27-Jul-2000, LatestRevisionDate=12-Dec-2006, LatestRevisionNote="IPC-7351 Footprint Added.", PackageDescription="3-Pin SOT-23 Package 0.95 mm Pitch, 2.3 mm Lead Span", PackageReference=SOT23, PackageVersion=May-1999, Published=17-Sep-2003, Publisher="Altium Limited"
Q300: "HEXFET Power MOSFET", ComponentLink1Description="Manufacturer Link", ComponentLink1URL=http://www.irf.com/, ComponentLink2Description=Datasheet, ComponentLink2URL=http://www.irf.com/product-info/datasheets/data/irlml2803.pdf, DatasheetVersion=Aug-1997, LatestRevisionDate=20-Nov-2009, LatestRevisionNote="IPC-7351 Footprint Added.", PackageDescription="3-Pin SOT-23 Package 0.95 mm Pitch, 2.3 mm Lead Span", PackageReference=SOT-23, Published=8-Jun-2000, Publisher="Altium Limited"
R100 R101 R102 R103 R104 R105 R106 R107 R108 R109 R110 R111 R113 R114 R115 R118 R119 R120 R123 R200 R201 R202 R203 R204 R205 R306 R307 R308 R309 R310 R311 R312: "Resistor", LatestRevisionDate=17-Jul-2002, LatestRevisionNote="Re-released for DXP Platform.", PackageDescription="Axial Device, Thru-Hole; 2 Leads; 0.3 in Pin Spacing", PackageReference=AXIAL-0.3, Published=8-Jun-2000, Publisher="Altium Limited"
R112 R116 R117 R121 R122 R300 R301 R302 R303 R304 R305: library part SMD, Package=RESC1608X05N(0603), Distributor=Panasonic
  R112 R116 R117: Order Number=ERJ-3EKF1002V
  R121 R300 R302 R304: Order Number=ERJ-3EKF3902V
  R122 R301 R303 R305: Order Number=ERJ-3EKF2201V
U100: "3-Terminal Positive Voltage Regulators, 3-pin TO-252, Pb-Free", Manufacturer="National Semiconductor", PackageTopMarking=NSUZXYTT*LM78M05*CDT, PowerWise=N, Supplier Part Number 1=LM78M05CDT-ND, Code_JEDEC=TO-252-AA, ComponentLink1Description="LM78M05 Datasheet", ComponentLink1URL=http://www.national.com/ds/LM/LM78M05.pdf, ComponentLink2Description="LM78M05 Web Page", ComponentLink2URL=http://www.national.com/pf/LM/LM78M05.html, ComponentLink3Description="TD03B Package Page", ComponentLink3URL=http://www.national.com/packaging/folders/td03b.html, CompType="LDO IC", DatasheetVersion=Aug-2005, PackageDescription="TO252, Molded, Jedec, 6.8 x 6.10 x 2.30mm Body, 3 Lead, 2.28mm Pitch, Surface Mount", PackageReference=TD03B, PackageVersion="revD, Feb-2009", PartNumber=LM78M05CDT/NOPB, PinCount=3, Published=1-Mar-2010, Publisher="Altium Limited", RoHS=Y, Supplier 1=Digi-Key, Supplier 2=Farnell, Supplier Part Number 2=1469112
U200: "IC REG BUCK ADJ 3A SYNC 24TQFN", Package="TQFN-24 Maxim Integrated", Digi-Key_Part_Number=MAX17574ATG+-ND, Digi-Key_Purchase_URL=https://www.digikey.com/product-detail/en/maxim-integrated/MAX17574ATG-/MAX17574ATG--ND/6579157?WT.z_cid=ref_snapeda&utm_source=snapeda&utm_medium=aggregator&utm_campaign=buynow, MF="Maxim Integrated", MP=MAX17574ATG+
U300: "IC DVR HALF-BRIDGE HV 8-SOIC", Package="SOIC-8 Texas Instruments", Availability=Good, MF="Texas Instruments", MP=LM5107MAX/NOPB, Price="1.38 USD"
Z100: library part Crystal_smd_with_caps, Package="3-SMD, Non-Standard", Distributor="Abracon LLC", Order Number=AWSCR-8.00CV-T
J100 J101 J102 J103 J104 J105 J106 J200 J300 J301 J302 J303 J304 J305: LatestRevisionDate=17-Jul-2002, LatestRevisionNote="Re-released for DXP Platform.", Publisher="Altium Limited"
L200 L201: Code_IEC=1005, Code_JEITA=0402, LatestRevisionDate=29-May-2009, LatestRevisionNote="IPC-7351 Footprint Added.", PackageDescription="Chip Inductor", PackageReference=0402-A, Published=8-Jun-2000, Publisher="Altium Limited"

## Free pads (board coordinates)
  round 236.22 hole 15: 0(-2716.54,1712.6) 0(-2677.17,0) 0(0,0) 0(0,1732.28)

## Via types
v1: diameter 60, hole 11.81, Top Layer to Bottom Layer, 60 vias
v2: diameter 60, hole 15, Top Layer to Bottom Layer, 13 vias
v3: diameter 55, hole 11.81, Top Layer to Bottom Layer, 8 vias
v4: diameter 50, hole 11.81, Top Layer to Bottom Layer, 6 vias
v5: diameter 70, hole 11.81, Top Layer to Bottom Layer, 1 vias

## Nets (pads, with @x,y where several pads share a name; then routed paths per layer and width w, separated by ;. In a path a pad name is that pad's centre, name@x,y a point inside that pad or via, vN(x,y) a via of type N, cw(c..) or ccw(c..) an arc to the next point about the centre after c; other vN are vias at no path point)
1_H_CONTROL: IC100.43 IC200.37 | length 907.3
  Bottom Layer w10: IC100.43@-2477.09,683.8 -2322.2,683.8 -2259,747 -2259,930 -2239.1,949.9 -2239.1,1003.19 -2396,1160.09 -2396,1278 -2360.88,1313.12 IC200.37@-2351.72,1313.12
1_L_CONTROL: IC100.36 IC200.38 | length 733.5
  Bottom Layer w10: IC100.36@-2477.09,821.6 -2432.9,821.6 -2432,822.5 -2378.5,822.5 -2343,858 -2343,936 -2332,947 -2316,947 -2307,956 -2307,1041 -2415,1149 -2415,1294 -2376.2,1332.8 IC200.38@-2351.72,1332.8
2_H_CONTROL: IC100.42 R100.2 | length 458.6
  Bottom Layer w10: IC100.42@-2477.09,703.49 -2332.51,703.49 -2280,756 -2280,983 R100.2@-2271,992
2_L_CONTROL: IC100.35 IC200.40 | length 733.9
  Bottom Layer w10: IC100.35@-2477.09,841.28 -2391.72,841.28 -2369,864 -2369,938 -2381.74,950.74 -2381.74,1054.74 -2457,1130 -2457,1315 -2399.83,1372.17 IC200.40@-2351.72,1372.17
3_H_CONTROL: IC100.41 R101.2 | length 344.1
  Bottom Layer w10: IC100.41@-2477.09,723.17 -2339.83,723.17 -2305,758 -2305,872 -2316,883 R101.2@-2316,911
3_L_CONTROL: IC100.34 IC200.42 | length 717.9
  Bottom Layer w10: IC100.34@-2477.09,860.97 -2443.03,860.97 -2431,873 -2431,1042 -2499,1110 -2499,1331 -2418.46,1411.54 IC200.42@-2351.72,1411.54
5V_SWITCH: C102.2 C116.1 C118.1 IC101.3 IC102.1 IC102.3 IC103.1 R109.2 R110.2 R111.2 U100.3 U101.8 | length 3784.2
  Top Layer w15: -2310.46,-47 -2296,-32.54 -2296,174 -2267,203 -2217,203 -2183,169 R111.2@-2093,169 R109.2@-2020,169 R110.2@-1947,169
  Top Layer w20: U101.8@-2368,-47 -2310.46,-47 C118.1@-2310.46,-101
  Bottom Layer w15: C102.2@-2868,-65 -2888,-65 -2908,-45 -2908,-2 -2895.8,10.2 IC101.3@-2865.69,10.2
  Bottom Layer w20: IC102.1@-3330.11,1152.02 -3330.11,1115 -3255.31,1115 IC102.3@-3255.31,1152.02 -3255.31,1221.1 -3255.15,1221.26 C116.1@-3247.16,1221.26 ; IC103.1@-3192.4,1221.26 C116.1@-3247.16,1221.26 ; C102.2@-2868,-65 -2868,-138 ; v1(-2368,-78) -2428,-138 -2868,-138 ; C116.1@-3247.16,1221.26 -3333.76,1307.87 U100.3@-3333.76,1335.74 -3401,1268.5 -3401,87 -3176,-138 -2868,-138
_3.3V: C105.1 C107.1 C108.1 C109.1 C112.1 C114.1 IC100.1 IC100.19 IC100.32 IC100.48 IC100.64 IC102.5 R102.2 | length 3386.1
  Top Layer w20: v2(-2905.59,519.68) -2911,525.09 v3(-2911,926) -2485,926 -2474.59,915.59 v2(-2474.59,558.68)
  Top Layer w25: C114.1@-3317,954 -3332,939 -3332,705 -3296,669 -3075,669 -3002,742 -3002,867 -2943,926 v3(-2911,926)
  Bottom Layer w10: IC100.1@-2912.13,585.38 -2914.89,585.38 -2949.59,550.68 -2949.59,454.68 C105.1@-2906.59,411.68 ; v3(-2911,926) -2888.64,948.36 C107.1@-2888.64,976 -2888.64,996.64 -2928,1036 -2928,1065 -2897,1096 -2847,1096 -2784,1033 -2784,1000 -2789.95,994.05 -2790.61,994.05 -2802.87,981.79 IC100.19@-2802.87,950.54 ; C109.1@-2908.59,459.68 -2906.59,457.68 C105.1@-2906.59,411.68 ; v2@-2905.59,518.68 -2905.59,455.68 C109.1@-2902.59,452.68 ; C105.1@-2904.59,409.68 C105.1@-2906.59,411.68 ; IC100.64@-2842.24,515.5 -2842.24,510.02 -2867.59,484.68 -2867.59,421.68 -2877.59,411.68 C105.1@-2906.59,411.68 ; IC100.32@-2546.97,950.54 -2546.97,970.03 -2525,992 -2525,1033 -2512,1046 -2465,1046 -2450,1031 -2450,950 v2(-2475,925)
  Bottom Layer w25: IC102.5@-3330.11,1057.54 -3330.11,976.21 C114.1@-3315.9,962
_AGND: C100.2 C117.2 C120.2 C121.2 C122.2 C200.1 IC100.12 IC103.3 IC200.35 NT100.1 R122.2 | length 2574.5
  Top Layer w20: v1(-3097,1093) -3057,1133 ; R122.2@-2873,1410 C122.2@-2873,1365 -2873,1317 -3057,1133 ; v1@-2332,1180 -2342,1170 -2369,1170 -2458,1259 -2767,1259 -2790,1236 -2790,1156 -2813,1133 -3057,1133
  Bottom Layer w10: C120.2@-3196,610 C121.2@-3269,610 -3283,610 -3315.53,642.53 -3315.53,765.47 -3298,783 -3286,783 -3137.2,931.8 -3137.2,971.4 -3137,971.6 -3137,1017 C100.2@-3113,1041 -3076,1004 -3076,874 -3003.91,801.91 IC100.12@-2912.13,801.91 ; v1@-2347,1183 -2302.51,1227.49 IC200.35@-2302.51,1284.57
  Bottom Layer w20: C100.2@-3113,1041 -3113,1077 v1(-3097,1093)
  Bottom Layer w25: IC103.3@-3155,1126.74 -3130.74,1126.74 v1(-3097,1093) -3081,1109 C117.2@-3081,1137
  other v1: -2332,1181
_CTRL_GND: C101.2 C102.1 C103.2 C104.2 C105.2 C106.2 C107.2 C108.2 C109.2 C110.2 C111.2 C112.2 C113.2 C114.2 C115.2 C116.2 C118.2 C119.2 C201.2 C203.1 C205.1 C207.2 C208.2 C209.2 C211.1 C212.2 C213.2 C300.2 C301.1 C302.2 C303.2 C304.2 C305.2 C306.2 D100.3 D200.1 IC100.18 IC100.60 IC100.63 IC101.2 IC102.2 IC200.0 IC200.2 IC200.27 IC200.43 IC200.46 NT100.2 NT300.2 NT301.2 NT302.2 P100.3 P101.1 P102.2 P103.2 P104.2 Q100.2 Q101.2 Q301.2 Q308.2 Q308.3 Q308.4 Q308.5 Q308.6 R200.2 R203.1 R205.1 R301.2 R303.2 R305.2 R307.2 R309.1 R311.1 R312.1 U100.4 U101.3 U101.4 U200.2 U200.3 U200.11 U200.21 U200.25 U300.2 U300.4 Z100.2 | length 3225.7
  Top Layer w20: C119.2@-2255,144.46 -2255,103 ; C118.2@-2243.54,-101 -2255,-89.54 -2255,103 ; U101.3@-2179.54,53 U101.4@-2179.54,103 -2255,103
  Bottom Layer w10: IC100.18@-2822.56,950.54 -2822.56,1012.8 C107.2@-2819.36,1016 ; -2766,358 -2763.5,360.5 IC100.60@-2763.5,515.5 ; -2496,1522 -2462,1522 -2430.28,1490.28 IC200.46@-2351.72,1490.28 IC200.0@-2293.03,1490.28 ; C104.2@-2487.13,1002.87 C104.2@-2487.13,1007.68 ; -2479,1379 -2426.77,1431.23 IC200.43@-2351.72,1431.23 IC200.0@-2290.77,1431.23 ; R205.1@-2393,1687 -2302.51,1596.51 IC200.2@-2302.51,1558.2 -2302.51,1505.97 IC200.0@-2290.93,1494.39 ; IC200.0@-2167,1353 -2145.03,1331.03 IC200.27@-2145.03,1284.57 -2145.03,1249.03 ; -827.58,-103.57 U200.11@-827.58,-49.89 -827.58,26.69 U200.25@-807.89,46.37 ; U200.21@-827.58,142.63 -827.58,46.37 U200.25@-807.89,46.37 ; U200.25@-807.89,85.74 U200.2@-731.32,85.74 ; U200.3@-731.32,66.06 -788.2,66.06 U200.25@-807.89,46.37
  Bottom Layer w20: C116.2@-3247,1358.9 -3247,1339 -3155,1247 -3155,1184 -3171,1168 -3188.5,1168 -3201,1155.5 -3201,984.9 C114.2@-3178.1,962
  Bottom Layer w60: v1@-1830,430 v1(-1780.5,430) v1@-1765.03,430 ; v1@-1790,1327 v1(-1788,1325) v1(-1719,1325) -1719,1293.97 R309.1@-1752.03,1260.94 ; v1(-1786,1381) v1(-1717,1381) v1@-1715,1379 ; v1@-1785,379 -1785,410.03 v1@-1765.03,430 ; v1@-1785,432 -1785,463.03 R312.1@-1751.97,496.06 ; R312.1@-1775.03,487 v1(-1847,487) -1847,415.03 -1808.97,377 v1(-1780.5,377) v1(-1716,377) ; R311.1@-1752.97,1498.06 -1786,1465.03 v1(-1786,1434) v1(-1717,1434) v1@-1715,1432 ; -1751.97,443.06 v1@-1765.03,430 ; v1@-1716,379 v1@-1714,377 ; v1(-1716,430) v1@-1765.03,430 ; v1@-1716,432 v1@-1714,430
  other v1: -1846,429 -2580,1529 -2337,1665 -3270,1723 -3225,1776.5 -3180,1830
  other v2: -1526,-103 -1130,-103 -401,-103 178,-101 -1526,106 -2941,203 -2668,205 -3344,495 -3279,855
_REF: C100.1 C117.1 C200.2 IC100.13 IC103.2 IC200.26 R112.1 R115.2 R116.1 R117.1 | length 4162.1
  Top Layer w20: v1(-3097,1238) -3121,1238 -3245,1114 -3245,1044 ; R115.2@-2509,63 -2591,145 -3331,145 -3411,225 -3411,1002 -3369,1044 -3245,1044 ; R112.1@-2080.09,1212 -2081.09,1211 v4(-2124,1211) C200.2@-2178.83,1211 -2178.83,1174.17 -2221,1132 -2389,1132 -2487,1230 -2744,1230 -2759,1215 -2759,1139 -2797,1101 -3007,1101 -3064,1044 -3245,1044
  Bottom Layer w10: C117.1@-3081,1217 -3033,1169 C100.1@-3033,1041 -3033,871 -2983.6,821.6 IC100.13@-2912.13,821.6 ; v4@-2127,1211 -2125.35,1212.65 IC200.26@-2125.35,1284.57